# Altium PCB TESTBED_IN4007.PcbDoc
Units mil, origin at the board's own origin, x right, y up, seen from the top; angles counter-clockwise.
Board outline 4725.41 x 4252.97 mil, 2 copper layers (TOP, BOTTOM), stack 10.4 mil thick; 28 components, 21 nets, 162 pads, 472 vias.
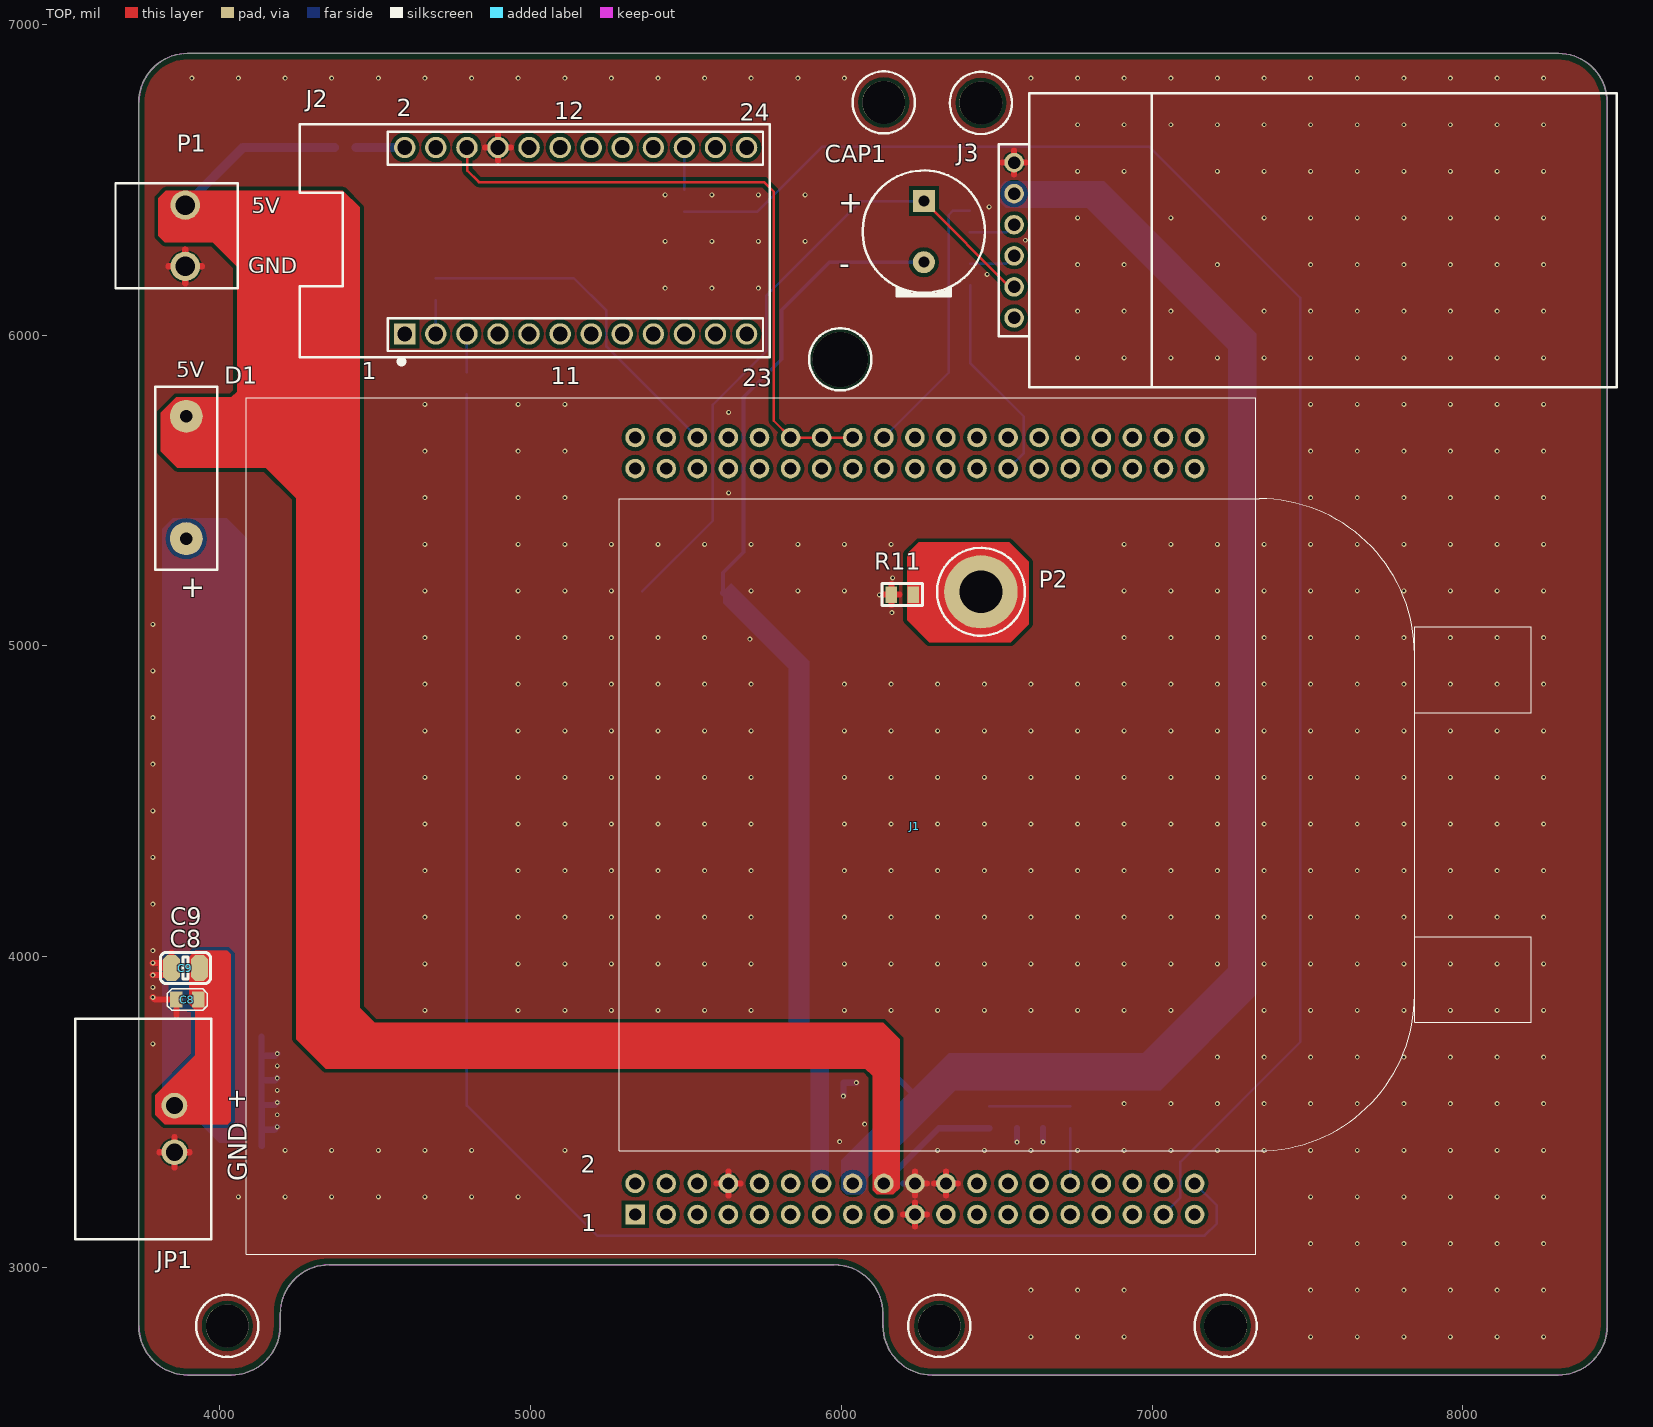
[diagram p0: TOP view]
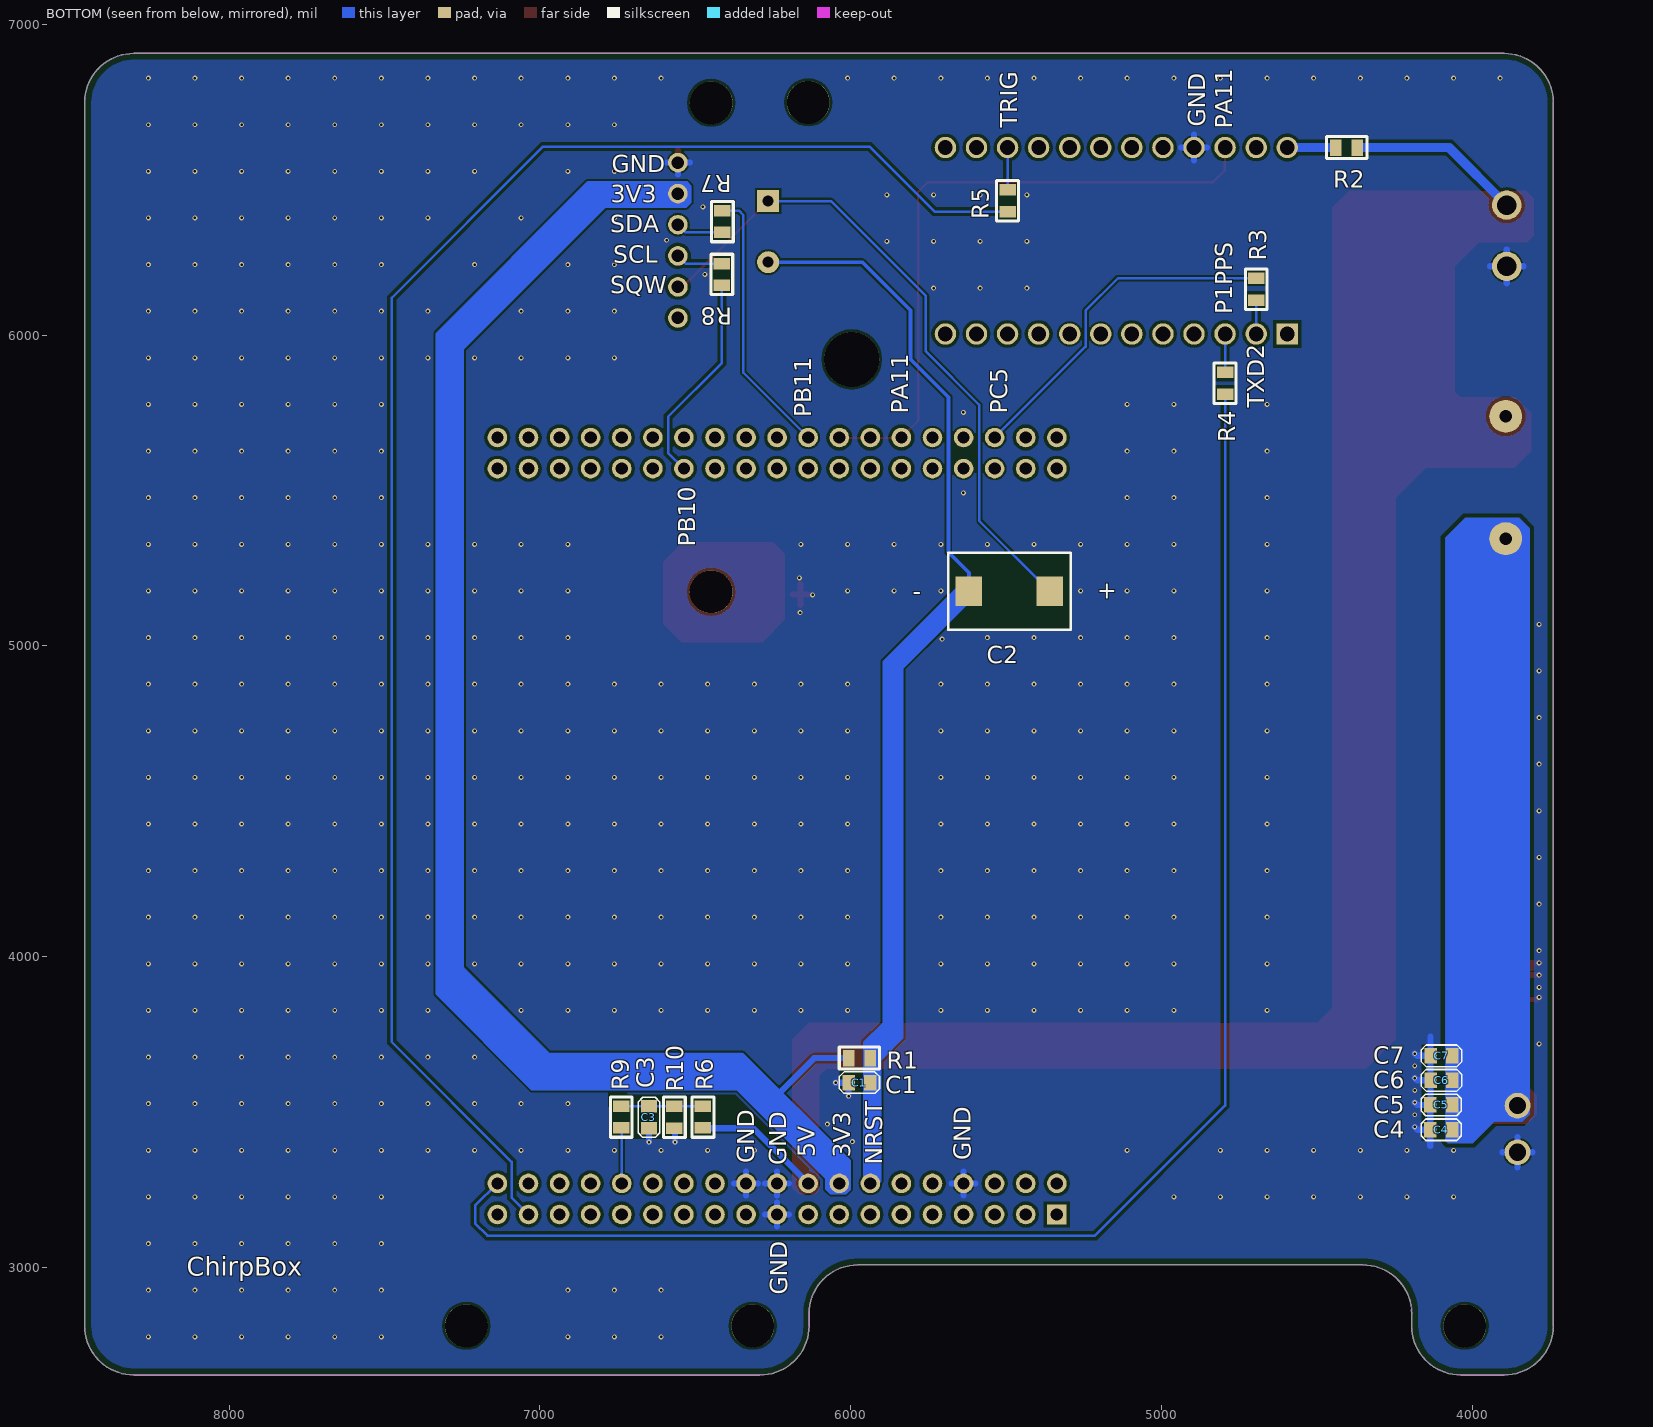
[diagram p1: BOTTOM view, seen from below]

## Layer stack, top to bottom
Top Solder: solder mask 0.4, Solder Resist, Dk 3.5
TOP: signal copper 1.2
Dielectric1: core 8, FR-4, Dk 4.5
BOTTOM: signal copper 1.2
Bottom Solder: solder mask 0.4, Solder Resist, Dk 3.5

## Board outline
3739.05,2811.89 3739.05,6748.9 cw(c3897.04,6748.9) 3897.04,6906.88 8306.27,6906.88 cw(c8306.27,6748.68) 8464.46,6748.91 8464.47,6748.9 8464.47,2811.89 cw(c8306.48,2811.95) 8306.49,2653.97 8306.48,2653.97 6291.49,2653.91 cw(c6291.49,2811.89) 6133.5,2811.89 6133.5,2851.26 ccw(c5976.52,2851.26) 5976.53,3008.24 4351.43,3008.24 ccw(c4351.43,2851.26) 4194.44,2851.26 4194.44,2811.89 cw(c4036.46,2811.89) 4036.46,2653.91 3897.04,2653.91 cw(c3897.04,2811.89)

## Design rules (kind name [scope] priority, off if disabled: settings)
Clearance Clearance_1 [All] p1: gap=6 ignorepadtopadclearanceinfootprint=FALSE except(0: Arc-Hole Track-Hole SMDPad-Hole THPad-Hole Via-Hole Fill-Hole Poly-Hole Region-Hole Text-Hole)
Clearance DRC [All] p2: gap=6 ignorepadtopadclearanceinfootprint=FALSE except(0: Arc-Hole Track-Hole SMDPad-Hole THPad-Hole Via-Hole Fill-Hole Poly-Hole Region-Hole Text-Hole)
PlaneConnect [All] p1: planeconnectstyle=Direct reliefexpansion=20 reliefentries=4 reliefconductorwidth=10 reliefairgap=10
PolygonConnect [All] p1: connectstyle=Direct reliefconductorwidth=10 reliefentries=4 polygonreliefangle="90 Angle" airgapwidth=10
RoutingVias [All] p1: holewidth=8 width=16 viastyle="Through Hole" minholewidth=8 minwidth=16 maxholewidth=8 maxwidth=16
SilkToSolderMaskClearance SilkscreenOverComponentPads [IsPad] p1: minsilkscreentomaskgap=10 clearancetoexposedcopper=TRUE
SolderMaskExpansion [All] p1: expansion=4 istentingtop=FALSE
Width [All] p1: maxlimit=200 minlimit=5 preferedwidth=20 minimp=50.000000 maximp=50.000000 favimp=50.000000
28 further rules are at their usual default settings.

## Components (designator, comment, footprint, x,y, rotation, side; value= is the part's Value field where it differs from the comment)
C1 "0.1U_C0805_DNP" C0805 5971.31,3594.73 r180 bottom
C2 "47U 25V_0_C7374_100U 25V X7R" C7374 5489.36,5175.32 r180 bottom
C3 "0.1U_C0805_0.1U" C0805 6648.55,3483.19 r90 bottom
C4 "0.1U_C0805_0.1U" C0805 4099.39,3443.22 r180 bottom
C5 "0.1U_C0805_0.1U" C0805 4099.38,3523.23 r180 bottom
C6 "0.1U_C0805_0.1U" C0805 4098.42,3602.3 r180 bottom
C7 "0.1U_C0805_0.1U" C0805 4098.42,3681.22 r180 bottom
C8 "1U_C0805_1U" C0805 3895.12,3862.29 r0 top
C9 "10U_C1206_10U" C1206 3889.17,3963.59 r180 top
CAP1 "220U 50V_CP2V_D10R0_5R0_DNP" CP2V_D10R0_5R0 6265.1,6327.31 r270 top locked
D1 "1N4007_2D7X2_1N4007" 2D7X2 3891.76,5539.78 r90 top
J1 "NUCLEO_PLUG_38PX2_(S1+S2)_NUCLE" 38PX2 6152.2,4420.59 r0 top locked
J2 "NAVSPARK CONN_12PX2_2D54_15D24_" 12PX2_2D54_15D24 5011.52,6302.42 r0 top locked
J3 "RTC_PLUG_2D54_6P_FEMALE_SMT_RTC" 2D54_6P_FEMALE_SMT 6554.32,6304.95 r0 top locked
JP1 "DC2.0_3D81X2_HOLES" 3D81X2 3753.5,3445.25 r270 top locked
P1 "BAT_MY_2PIN_BAT" MY_2PIN 3860.1,6319.7 r270 top
P2 "HOLE3D5_I3D5_O6MM_HOLE3D5" I3D5_O6MM 6448.84,5174.1 r0 top
R1 "100K_R0805_100K" R0805 5971.31,3673.99 r180 bottom
R2 "DNP_R0805_DNP" R0805 4403.8,6603.8 r0 bottom
R3 "33_R0805_33" R0805 4694.78,6148.19 r90 bottom
R4 "33_R0805_33" R0805 4794.89,5845.27 r270 bottom
R5 "33_R0805_33" R0805 5494.78,6432.92 r90 bottom
R6 "100K_R0805_100K" R0805 6475,3484 r90 bottom
R7 "33_R0805_33" R0805 6412.41,6365.55 r90 bottom
R8 "33_R0805_33" R0805 6414.11,6195.47 r270 bottom
R9 "33_R0805_33" R0805 6738,3484 r90 bottom
R10 "100K_R0805_100K" R0805 6567,3483 r90 bottom
R11 "DNP_R0805_DNP" R0805 6195.86,5165.2 r0 top locked

## Footprints (in the part's own frame and the unit in brackets; to place one, negate y for a bottom-side part, rotate by r counter-clockwise, add the part's x,y. Pads: shape width x height; smd on the part's side, far side on the other; paste and mask are expansions set on the pad)
2D7X2 [mm] "2D7X2"
  round 2.7 hole 1: 1(-4.94,0) 2(5.06,0)
  silkscreen extent -7.48,-2.54 7.48,2.54
2D54_6P_FEMALE_SMT [mm] "2D54_6P_FEMALE_SMT"
  round 1.6 hole 1.02: 1(0.03,6.36) 2(0.03,3.82) 3(0.03,1.28) 4(0.03,-1.26) 5(0.03,-3.8) 6(0.03,-6.34)
  silkscreen extent -1.22,-11.99 49.28,12.01
3D81X2 [mm] "3D81X2"
  round 2.1 hole 1.4: 1(-1.92,2.545) 2(1.89,2.545)
  silkscreen extent -9.02,-5.56 9,5.54
12PX2_2D54_15D24 [mil] "12PX2_2D54_15D24"
  rect 68.9x68.9 hole 47.24: 1(-416.73,-298.62)
  round 68.9 hole 47.24: 2(-416.73,301.38) 3(-316.73,-298.62) 4(-316.73,301.38) 5(-216.73,-298.62) 6(-216.73,301.38) 7(-116.73,-298.62) 8(-116.73,301.38) 9(-16.73,-298.62) 10(-16.73,301.38) 11(83.27,-298.62) 12(83.27,301.38) 13(183.27,-298.62) 14(183.27,301.38) 15(283.27,-298.62) 16(283.27,301.38) 17(383.27,-298.62) 18(383.27,301.38) 19(483.27,-298.62) 20(483.27,301.38) 21(583.27,-298.62) 22(583.27,301.38) 23(683.27,-298.62) 24(683.27,301.38)
  silkscreen extent -754,-388 758,377
38PX2 [mm] "38PX2"
  rect 1.6x1.6 hole 1: 1(-20.725,-31.75)
  round 1.6 hole 1: 2(-20.725,-29.21) 3(-18.185,-31.75) 4(-18.185,-29.21) 5(-15.645,-31.75) 6(-15.645,-29.21) 7(-13.105,-31.75) 8(-13.105,-29.21) 9(-10.565,-31.75) 10(-10.565,-29.21) 11(-8.025,-31.75) 12(-8.025,-29.21) 13(-5.485,-31.75) 14(-5.485,-29.21) 15(-2.945,-31.75) 16(-2.945,-29.21) 17(-0.405,-31.75) 18(-0.405,-29.21) 19(2.135,-31.75) 20(2.135,-29.21) 21(4.675,-31.75) 22(4.675,-29.21) 23(7.215,-31.75) 24(7.215,-29.21) 25(9.755,-31.75) 26(9.755,-29.21) 27(12.295,-31.75) 28(12.295,-29.21) 29(14.835,-31.75) 30(14.835,-29.21) 31(17.375,-31.75) 32(17.375,-29.21) 33(19.915,-31.75) 34(19.915,-29.21) 35(22.455,-31.75) 36(22.455,-29.21) 37(24.995,-31.75) 38(24.995,-29.21) 39(-20.725,29.21) 40(-20.725,31.75) 41(-18.185,29.21) 42(-18.185,31.75) 43(-15.645,29.21) 44(-15.645,31.75) 45(-13.105,29.21) 46(-13.105,31.75) 47(-10.565,29.21) 48(-10.565,31.75) 49(-8.025,29.21) 50(-8.025,31.75) 51(-5.485,29.21) 52(-5.485,31.75) 53(-2.945,29.21) 54(-2.945,31.75) 55(-0.405,29.21) 56(-0.405,31.75) 57(2.135,29.21) 58(2.135,31.75) 59(4.675,29.21) 60(4.675,31.75) 61(7.215,29.21) 62(7.215,31.75) 63(9.755,29.21) 64(9.755,31.75) 65(12.295,29.21) 66(12.295,31.75) 67(14.835,29.21) 68(14.835,31.75) 69(17.375,29.21) 70(17.375,31.75) 71(19.915,29.21) 72(19.915,31.75) 73(22.455,29.21) 74(22.455,31.75) 75(24.995,29.21) 76(24.995,31.75)
  silkscreen extent -52.51,-35 52.51,35
C0805 [mm] "C0805"
  rect 1.02x1.27 smd: 1(0.89,0) 2(-0.89,0)
  silkscreen extent -1.64,-0.88 1.64,0.88
C1206 [mil] "C1206"
  oct 55x85 smd: 1(-45.28,0) 2(45.28,0)
  silkscreen extent -81,-50 81,50
C7374 [mm] "C7374"
  rect 2.16x2.41 smd: 1(3.315,0.005) 2(-3.295,0.005)
  silkscreen extent -4.98,-3.15 5.02,3.15
CP2V_D10R0_5R0 [mm] "CP2V_D10R0_5R0"
  rect 1.8x1.8 hole 0.9: 1(-2.649,0)
  round 1.8 hole 0.9: 2(2.351,0)
  silkscreen extent -5.15,-5 5.15,5
I3D5_O6MM [mm] "I3D5_O6MM"
  round 6 smd: 1(0,0)
  silkscreen extent -3.59,-3.59 3.59,3.59
MY_2PIN [mm] "MY_2PIN"
  round 2.4 hole 1.6: 1(-2.505,0.72) 2(2.495,0.72)
  silkscreen extent -4.3,-4.98 4.3,5.02
R0805 [mm] "R0805"
  rect 0.94x1.35 smd: 1(0.89,0) 2(-0.89,0)
  silkscreen extent -1.65,-0.89 1.65,0.89

## Free pads (board coordinates)
  round 137.79 hole 137.79: 1(4023.7,2811.89) 1(6136.07,6748.9) 1(6314.94,2811.89) 1(6448.73,6747.24) 1(6448.84,5174.1) 1(7236.25,2811.89)
  round 177.16 hole 177.16: 1(5996.09,5922.13)

## Via types
v1: diameter 16, hole 8, TOP to BOTTOM, 472 vias

## Nets (pads, with @x,y where several pads share a name; then routed paths per layer and width w, separated by ;. In a path a pad name is that pad's centre, name@x,y a point inside that pad or via, vN(x,y) a via of type N, cw(c..) or ccw(c..) an arc to the next point about the centre after c; other vN are vias at no path point)
+3V3: J1.16 J3.2 R1.2 | length 274.7
  BOTTOM w20: R1.2 6117.01,3673.99 6232.98,3558.01
+5V: D1.2 J1.18 P1.1 R2.2 R6.2 | length 970.5
  BOTTOM w20: J1.18 6313.82,3448.15 R6.2@6476.07,3448.15
  BOTTOM w30: P1.1 4073.92,6603.8 R2.2
GND: C1.2 C3.2 C4.2 C5.2 C6.2 C7.2 C8.2 C9.2 J1.8 J1.19 J1.20 J1.22 J2.8 J3.1 JP1.2 P1.2 R10.2 R11.2 | length 3823.2
  TOP w20: v1(3784.24,3869.5) 3791.45,3862.29 C8.2 3860.09,3813.18 ; v1(3784.24,3940.76) 3821.06,3940.76 C9.2 ; v1(3784.24,3980.13) 3827.35,3980.13 C9.2 ; 3805.35,3370.84 JP1.2 ; 3809.29,3963.59 C9.2 ; 3834.2,6221.47 P1.2 ; 3843.89,4013.09 C9.2 ; 3853.69,3322.5 JP1.2 ; 3853.69,3419.18 JP1.2 ; 3888.45,6167.23 P1.2 ; 3888.45,6275.72 P1.2 ; 3902.03,3370.84 JP1.2 ; 3942.69,6221.47 P1.2 ; 4853.33,6603.8 J2.8 ; 4894.78,6562.35 J2.8 ; 4894.78,6645.25 J2.8 ; 4936.24,6603.8 J2.8 ; 5597.75,3270.59 J1.8 ; 5636.25,3232.09 J1.8 ; 5636.25,3309.09 J1.8 ; 5674.75,3270.59 J1.8 ; 6135.31,5165.2 R11.2 ; 6160.82,5131.63 R11.2 ; 6160.82,5198.78 R11.2 ; 6186.33,5165.2 R11.2 ; 6197.75,3170.59 J1.19 ; 6236.25,3132.09 J1.19 ; 6236.25,3209.09 J1.19 ; 6236.25,3232.09 J1.20 ; 6236.25,3309.09 J1.20 ; 6274.75,3170.59 J1.19 ; 6274.75,3270.59 J1.20 ; 6297.75,3270.59 J1.22 ; 6336.25,3232.09 J1.22 ; 6336.25,3309.09 J1.22 ; 6374.75,3270.59 J1.22 ; 6517.01,6555.35 J3.1 ; 6555.51,6516.85 J3.1 ; 6555.51,6593.84 J3.1 ; 6594,6555.35 J3.1
  BOTTOM w20: 3805.35,3370.84 JP1.2 ; 3834.2,6221.47 P1.2 ; 3853.69,3322.5 JP1.2 ; 3853.69,3419.18 JP1.2 ; 3888.45,6167.23 P1.2 ; 3888.45,6275.72 P1.2 ; 3902.03,3370.84 JP1.2 ; 3942.69,6221.47 P1.2 ; 4133.46,3743.29 C7.2 ; 4134.42,3390.86 C4.2 ; v1(4184.52,3452.13) 4175.61,3443.22 C4.2 ; v1(4184.52,3530.87) 4176.88,3523.23 C5.2 ; v1(4184.52,3609.61) 4177.22,3602.3 C6.2 ; v1(4184.52,3688.35) 4177.4,3681.22 C7.2 ; 4853.33,6603.8 J2.8 ; 4894.78,6562.35 J2.8 ; 4894.78,6645.25 J2.8 ; 4936.24,6603.8 J2.8 ; 5597.75,3270.59 J1.8 ; 5636.25,3232.09 J1.8 ; 5636.25,3309.09 J1.8 ; 5674.75,3270.59 J1.8 ; v1(6006.35,3551.68) C1.2 v1(6048.05,3594.73) ; 6197.75,3170.59 J1.19 ; 6197.75,3270.59 J1.20 ; 6236.25,3132.09 J1.19 ; 6236.25,3209.09 J1.19 ; 6236.25,3232.09 J1.20 ; 6236.25,3309.09 J1.20 ; 6274.75,3170.59 J1.19 ; 6274.75,3270.59 J1.20 ; 6297.75,3270.59 J1.22 ; 6336.25,3232.09 J1.22 ; 6336.25,3309.09 J1.22 ; 6374.75,3270.59 J1.22 ; 6517.01,6555.35 J3.1 ; 6555.51,6516.85 J3.1 ; v1(6564.89,3403.45) R10.2@6564.89,3448.15 ; 6594,6555.35 J3.1 ; v1(6648.55,3403.45) C3.2 ; C6.2 4133.47,3524.19 C5.2 ; C6.2 C7.2 ; C4.2 C5.2
  other v1: 6609.7,2777.05 6759.7,2777.05 6909.7,2777.05 7509.7,2777.05 7659.7,2777.05 7809.7,2777.05 7959.7,2777.05 8109.7,2777.05 8259.7,2777.05 6609.7,2927.05 6759.7,2927.05 6909.7,2927.05 7509.7,2927.05 7659.7,2927.05 7809.7,2927.05 7959.7,2927.05 8109.7,2927.05 8259.7,2927.05 7509.7,3077.05 7659.7,3077.05 7809.7,3077.05 7959.7,3077.05 8109.7,3077.05 8259.7,3077.05 4059.7,3227.05 4209.7,3227.05 4359.7,3227.05 4509.7,3227.05 4659.7,3227.05 4809.7,3227.05 4959.7,3227.05 7509.7,3227.05 7659.7,3227.05 7809.7,3227.05 7959.7,3227.05 8109.7,3227.05 8259.7,3227.05 4059.7,3377.05 4209.7,3377.05 4359.7,3377.05 4509.7,3377.05 4659.7,3377.05 4809.7,3377.05 5109.7,3377.05 6309.7,3377.05 6459.7,3377.05 6609.7,3377.05 6759.7,3377.05 6909.7,3377.05 7059.7,3377.05 7209.7,3377.05 7359.7,3377.05 7509.7,3377.05 7659.7,3377.05 7809.7,3377.05 7959.7,3377.05 8109.7,3377.05 8259.7,3377.05 5994,3405 6074.71,3461.4 4184.52,3491.5 6909.7,3527.05 7059.7,3527.05 7209.7,3527.05 7359.7,3527.05 7509.7,3527.05 7659.7,3527.05 7809.7,3527.05 7959.7,3527.05 8109.7,3527.05 8259.7,3527.05 4184.52,3570.24 4184.52,3648.98 7209.7,3677.05 7359.7,3677.05 7509.7,3677.05 7659.7,3677.05 7809.7,3677.05 7959.7,3677.05 8109.7,3677.05 8259.7,3677.05 3784.24,3719.5 4659.7,3827.05 4959.7,3827.05 5109.7,3827.05 5259.7,3827.05 5409.7,3827.05 5559.7,3827.05 5709.7,3827.05 6009.7,3827.05 6159.7,3827.05 6309.7,3827.05 6459.7,3827.05 6609.7,3827.05 6759.7,3827.05 6909.7,3827.05 7059.7,3827.05 7359.7,3827.05 7509.7,3827.05 7659.7,3827.05 7809.7,3827.05 7959.7,3827.05 8109.7,3827.05 8259.7,3827.05 3784.24,3901.39 4659.7,3977.05 4959.7,3977.05 5109.7,3977.05 5259.7,3977.05 5409.7,3977.05 5559.7,3977.05 5709.7,3977.05 6009.7,3977.05 6159.7,3977.05 6309.7,3977.05 6459.7,3977.05 6609.7,3977.05 6759.7,3977.05 6909.7,3977.05 7059.7,3977.05 7209.7,3977.05 7359.7,3977.05 7509.7,3977.05 7659.7,3977.05 7809.7,3977.05 7959.7,3977.05 8109.7,3977.05 8259.7,3977.05 3784.24,4019.5 4659.7,4127.05 4959.7,4127.05 5109.7,4127.05 5259.7,4127.05 5409.7,4127.05 5559.7,4127.05 5709.7,4127.05 6009.7,4127.05 6159.7,4127.05 6309.7,4127.05 6459.7,4127.05 6609.7,4127.05 6759.7,4127.05 6909.7,4127.05 7059.7,4127.05 7209.7,4127.05 7359.7,4127.05 7509.7,4127.05 7659.7,4127.05 7809.7,4127.05 7959.7,4127.05 8109.7,4127.05 8259.7,4127.05 3784.24,4169.5 4659.7,4277.05 4959.7,4277.05 5109.7,4277.05 5259.7,4277.05 5409.7,4277.05 5559.7,4277.05 5709.7,4277.05 6009.7,4277.05 6159.7,4277.05 6309.7,4277.05 6459.7,4277.05 6609.7,4277.05 6759.7,4277.05 6909.7,4277.05 7059.7,4277.05 7209.7,4277.05 7359.7,4277.05 7509.7,4277.05 7659.7,4277.05 7809.7,4277.05 7959.7,4277.05 8109.7,4277.05 8259.7,4277.05 3784.24,4319.5 4659.7,4427.05 4959.7,4427.05 5109.7,4427.05 5259.7,4427.05 5409.7,4427.05 5559.7,4427.05 5709.7,4427.05 6009.7,4427.05 6159.7,4427.05 6309.7,4427.05 6459.7,4427.05 6609.7,4427.05 6759.7,4427.05 6909.7,4427.05 7059.7,4427.05 7209.7,4427.05 7359.7,4427.05 7509.7,4427.05 7659.7,4427.05 7809.7,4427.05 7959.7,4427.05 8109.7,4427.05 8259.7,4427.05 3784.24,4469.5 4659.7,4577.05 4959.7,4577.05 5109.7,4577.05 5259.7,4577.05 5409.7,4577.05 5559.7,4577.05 5709.7,4577.05 6009.7,4577.05 6159.7,4577.05 6309.7,4577.05 6459.7,4577.05 6609.7,4577.05 6759.7,4577.05 6909.7,4577.05 7059.7,4577.05 7209.7,4577.05 7359.7,4577.05 7509.7,4577.05 7659.7,4577.05 7809.7,4577.05 7959.7,4577.05 8109.7,4577.05 8259.7,4577.05 3784.24,4619.5 4659.7,4727.05 4959.7,4727.05 5109.7,4727.05 5259.7,4727.05 5409.7,4727.05 5559.7,4727.05 5709.7,4727.05 6009.7,4727.05 6159.7,4727.05 6309.7,4727.05 6459.7,4727.05 6609.7,4727.05 6759.7,4727.05 6909.7,4727.05 7059.7,4727.05 7209.7,4727.05 7359.7,4727.05 7509.7,4727.05 7659.7,4727.05 7809.7,4727.05 7959.7,4727.05 8109.7,4727.05 8259.7,4727.05 3784.24,4769.5 4659.7,4877.05 4959.7,4877.05 5109.7,4877.05 5259.7,4877.05 5409.7,4877.05 5559.7,4877.05 5709.7,4877.05 6009.7,4877.05 6159.7,4877.05 6309.7,4877.05 6459.7,4877.05 6609.7,4877.05 6759.7,4877.05 6909.7,4877.05 7059.7,4877.05 7209.7,4877.05 7359.7,4877.05 7509.7,4877.05 7659.7,4877.05 7809.7,4877.05 7959.7,4877.05 8109.7,4877.05 8259.7,4877.05 3784.24,4919.5 5705,5022 4659.7,5027.05 4959.7,5027.05 5109.7,5027.05 5259.7,5027.05 5409.7,5027.05 5559.7,5027.05 6909.7,5027.05 7059.7,5027.05 7209.7,5027.05 7359.7,5027.05 7509.7,5027.05 7659.7,5027.05 7809.7,5027.05 7959.7,5027.05 8109.7,5027.05 8259.7,5027.05 3784.24,5069.5 6162.34,5107.15 6121.98,5164.15 4659.7,5177.05 4959.7,5177.05 5109.7,5177.05 5259.7,5177.05 5709.7,5177.05 5859.7,5177.05 6009.7,5177.05 6909.7,5177.05 7059.7,5177.05 7209.7,5177.05 7359.7,5177.05 7509.7,5177.05 7659.7,5177.05 7809.7,5177.05 7959.7,5177.05 8109.7,5177.05 8259.7,5177.05 6164.3,5219.18 4659.7,5327.05 4959.7,5327.05 5109.7,5327.05 5259.7,5327.05 5409.7,5327.05 5559.7,5327.05 5709.7,5327.05 5859.7,5327.05 6009.7,5327.05 6159.7,5327.05 6909.7,5327.05 7059.7,5327.05 7209.7,5327.05 7359.7,5327.05 7509.7,5327.05 7659.7,5327.05 7809.7,5327.05 7959.7,5327.05 8109.7,5327.05 8259.7,5327.05 4659.7,5477.05 4959.7,5477.05 5109.7,5477.05 7509.7,5477.05 7659.7,5477.05 7809.7,5477.05 7959.7,5477.05 8109.7,5477.05 8259.7,5477.05 5637.24,5492.67 4659.7,5627.05 4959.7,5627.05 5109.7,5627.05 7509.7,5627.05 7659.7,5627.05 7809.7,5627.05 7959.7,5627.05 8109.7,5627.05 8259.7,5627.05 5637.24,5751.65 4659.7,5777.05 4959.7,5777.05 5109.7,5777.05 7509.7,5777.05 7659.7,5777.05 7809.7,5777.05 7959.7,5777.05 8109.7,5777.05 8259.7,5777.05 6759.7,5927.05 6909.7,5927.05 7059.7,5927.05 7209.7,5927.05 7359.7,5927.05 7509.7,5927.05 7659.7,5927.05 7809.7,5927.05 7959.7,5927.05 8109.7,5927.05 8259.7,5927.05 6759.7,6077.05 6909.7,6077.05 7059.7,6077.05 7359.7,6077.05 7509.7,6077.05 7659.7,6077.05 7809.7,6077.05 7959.7,6077.05 8109.7,6077.05 8259.7,6077.05 5432.86,6151.5 5582.86,6151.5 5732.86,6151.5 6469.06,6195.4 6759.7,6227.05 6909.7,6227.05 7209.7,6227.05 7509.7,6227.05 7659.7,6227.05 7809.7,6227.05 7959.7,6227.05 8109.7,6227.05 8259.7,6227.05 5432.86,6301.5 5582.86,6301.5 5732.86,6301.5 5882.86,6301.5 6592.1,6305.43 6759.7,6377.05 7059.7,6377.05 7359.7,6377.05 7509.7,6377.05 7659.7,6377.05 7809.7,6377.05 7959.7,6377.05 8109.7,6377.05 8259.7,6377.05 6475.41,6413.11 5432.86,6451.5 5582.86,6451.5 5732.86,6451.5 5882.86,6451.5 6759.7,6527.05 6909.7,6527.05 7209.7,6527.05 7359.7,6527.05 7509.7,6527.05 7659.7,6527.05 7809.7,6527.05 7959.7,6527.05 8109.7,6527.05 8259.7,6527.05 6759.7,6677.05 6909.7,6677.05 7059.7,6677.05 7209.7,6677.05 7359.7,6677.05 7509.7,6677.05 7659.7,6677.05 7809.7,6677.05 7959.7,6677.05 8109.7,6677.05 8259.7,6677.05 3909.7,6827.05 4059.7,6827.05 4209.7,6827.05 4359.7,6827.05 4509.7,6827.05 4659.7,6827.05 4809.7,6827.05 4959.7,6827.05 5109.7,6827.05 5259.7,6827.05 5409.7,6827.05 5559.7,6827.05 5709.7,6827.05 5859.7,6827.05 6009.7,6827.05 6609.7,6827.05 6759.7,6827.05 6909.7,6827.05 7059.7,6827.05 7209.7,6827.05 7359.7,6827.05 7509.7,6827.05 7659.7,6827.05 7809.7,6827.05 7959.7,6827.05 8109.7,6827.05 8259.7,6827.05
N3250342: C3.1 R6.1 R9.1 R10.1 | length 260.2
  BOTTOM w8: R6.1@6476.07,3518.23 6564.89,3518.23 C3.1 R9.1@6736.25,3518.23
N3272272: C4.1 C5.1 C6.1 C7.1 C8.1 C9.1 D1.1 JP1.1
N32806180: P2.1 pad.1@6448.84,5174.1 R11.1 | length 593.1
  TOP w20: 6230.9,5131.63 R11.1 ; 6230.9,5198.78 R11.1 ; 6256.41,5165.2 R11.1 ; 6323.73,5174.1 P2.1 ; 6448.84,5048.98 P2.1 ; 6448.84,5299.21 P2.1 ; 6573.96,5174.1 P2.1
N324336412: J2.2 R2.1 | length 155.9
  BOTTOM w30: R2.1 J2.2
NRST: C1.1 C2.2 CAP1.2 J1.14 R1.1 | length 3541.1
  BOTTOM w8: C2.2@5619.09,5170.59 C2.2 ; J1.14 5936.44,3270.78 J1.14@5936.44,3285.8 ; R1.1 R1.1@5936.27,3682.06
  BOTTOM w12: C2.2 5619.09,5235.56 5684.83,5301.3 5684.83,5800.33 5807,5922.5 5807,6080.22 5961.55,6234.77 CAP1.2
  BOTTOM w20: C2.2@5619.09,5170.59 5864.59,4925.09 5864.59,3753.74 R1.1@5936.27,3682.06 ; R1.1 C1.1 5936.44,3594.56 J1.14@5936.44,3285.8
P1PPS: J2.5 R4.2 | length 123.5
  BOTTOM w8: J2.5 4794.89,6003.7 R4.2
PA1/A1: J1.30 R9.2 | length 177.6
  BOTTOM w8: J1.30 R9.2@6736.25,3448.15
PA11: J1.50 J1.52 J1.54 J2.6 | length 2102.4
  TOP w8: J2.6 4796.03,6602.55 4796.03,6529.72 4833.21,6492.55 5751.34,6492.55 5782.24,6461.65 5782.24,5724.6 J1.50 J1.52 J1.54
PB10: J1.63 R8.1 | length 682.5
  BOTTOM w8: R8.1 6414.11,5910.58 6587.08,5737.61 6587.08,5621.41 J1.63
PB11: J1.56 R7.1 | length 875.3
  BOTTOM w8: J1.56 6345.17,5879.51 6345.17,6386.18 6359.57,6400.58 R7.1
PC0: J1.38 R4.1 | length 5050.6
  BOTTOM w8: R4.1 4794.89,3520.93 5213.53,3102.28 7168.29,3102.28 7208.03,3142.03 7208.03,3198.81 J1.38
PC2: J1.35 R5.2 | length 5401.5
  BOTTOM w8: R5.2 5729.74,6397.88 5938.8,6606.95 6989.45,6606.95 7476.28,6120.12 7476.28,3725.72 7090.39,3339.83 7090.39,3224.73 J1.35
PC5: J1.44 R3.1 | length 1121.5
  BOTTOM w8: R3.1 5139.24,6183.23 5243.49,6078.98 5243.49,5963.35 J1.44
SCL: J3.4 R8.2 | length 151.7
  BOTTOM w8: R8.2 6530.66,6230.51 J3.4
SDA: J3.3 R7.2 | length 153.4
  BOTTOM w8: R7.2 6530.66,6330.51 J3.3
SQW: C2.1 CAP1.1 J3.5 | length 2154.8
  TOP w8: CAP1.1 6541.37,6155.35 J3.5
  BOTTOM w8: C2.1 5586.1,5402.76 5586.1,5776.11 5757.48,5947.49 5757.48,6126.33 6062.77,6431.62 CAP1.1
TRIG: J2.20 R5.1 | length 135.8
  BOTTOM w8: R5.1 J2.20
TXD2: J2.3 R3.2 | length 109.4
  BOTTOM w8: J2.3 R3.2
pads on no net: J1.1 J1.2 J1.3 J1.4 J1.5 J1.6 J1.7 J1.9 J1.10 J1.11 J1.12 J1.13 J1.15 J1.17 J1.21 J1.23 J1.24 J1.25 J1.26 J1.27 J1.28 J1.29 J1.31 J1.32 J1.33 J1.34 J1.36 J1.37 J1.39 J1.40 J1.41 J1.42 J1.43 J1.45 J1.46 J1.47 J1.48 J1.49 J1.51 J1.53 J1.55 J1.57 J1.58 J1.59 J1.60 J1.61 J1.62 J1.64 J1.65 J1.66 J1.67 J1.68 J1.69 J1.70 J1.71 J1.72 J1.73 J1.74 J1.75 J1.76 J2.1 J2.4 J2.7 J2.9 J2.10 J2.11 J2.12 J2.13 J2.14 J2.15 J2.16 J2.17 J2.18 J2.19 J2.21 J2.22 J2.23 J2.24 J3.6

## Polygon pours and split planes (outlines as drawn)
no net on 2020_1126_TOP (solid): 6159.12,5793.01 6126.8,5760.37 6045.04,5873.65 6159.12,5793.01
no net on 2020_1126_TOP (solid): 5833.06,6051.24 5865.38,6083.88 5947.13,5970.61 5833.06,6051.24
no net on 2020_1126_TOP (solid): 6097.63,2738.16 6068.54,2702.61 5976.43,2807.64 6097.63,2738.16
no net on 2020_1126_TOP (solid): 5748.59,2964.37 5777.67,2999.92 5869.78,2894.89 5748.59,2964.37
no net on 2020_1126_TOP (solid): 3640.34,7410.7 3609.51,7376.65 3522.8,7486.18 3640.34,7410.7
no net on 2020_1126_TOP (solid): 3232.71,7717.92 3263.54,7751.96 3350.26,7642.44 3232.71,7717.92
no net on 2020_1126_TOP (solid): 1379.26,6693.78 1308.4,6693.78 1343.83,6906.38 1379.26,6693.78
no net on 2020_1126_TOP (solid): 1308.4,2867.01 1379.26,2867.01 1343.83,2654.41 1308.4,2867.01
no net on 2020_1126_TOP (solid): 3952.15,8549.26 3952.15,8478.4 3739.55,8513.83 3952.15,8549.26
no net on 2020_1126_TOP (solid): 8251.37,8478.4 8251.37,8549.26 8463.97,8513.83 8251.37,8478.4
GND on TOP "TOP-GND" (solid, pour order 18): 162 vertices, not listed, extent 3758.07,2675 8442.48,6886.97
N32806180 on TOP "TOP-N32806180" (solid, pour order 12): 6603.1,5069.97 6545.37,5012.25 6282.19,5012.25 6211.52,5082.92 6211.52,5133.63 6254.41,5133.63 6254.41,5196.78 6211.52,5196.78 6211.52,5296.07 6248.6,5333.16 6540.48,5333.16 6603.1,5270.54 6603.1,5069.97
N3272272 on TOP "TOP-N3272272" (solid, pour order 26): 4034.96,3471.09 4025.06,3461.2 3821.88,3461.2 3792.21,3490.87 3792.21,3554.14 3920.7,3682.63 3920.7,3828.09 3901.99,3846.8 3901.99,4000.1 3920.7,4018.81 4023.49,4018.81 4034.96,4007.35 4034.96,3471.09
N3272272 on BOTTOM "BOTTOM-N3272272" (solid, pour order 24): 3816.16,3493.94 3816.16,5377.92 3848.45,5410.2 4022.31,5410.2 4086.27,5346.24 4086.27,3410.11 4078.2,3402.04 3998.1,3402.04 3929.17,3470.97 3839.13,3470.97 3816.16,3493.94
GND on BOTTOM "BOTTOM-GND" (solid, pour order 20): 162 vertices, not listed, extent 3758.07,2675 8442.48,6886.97
+3V3 on BOTTOM "BOTTOM-+3V3" (solid, pour order 16): 6066.1,3236.41 6013.32,3236.41 6000.16,3249.57 6000.16,3344.96 6346.14,3690.95 6968.34,3690.95 7245.29,3967.9 7245.29,5952.46 6787.15,6410.6 6528.32,6410.6 6512.04,6426.88 6512.04,6480.73 6525.81,6494.51 6848.55,6494.51 7334.7,6008.35 7334.7,3878.48 7026.71,3570.48 6365.39,3570.48 6081.31,3286.4 6081.31,3251.62 6066.1,3236.41

## Keep-outs
OUTLINE:
  lines w1: 3739.56,2811.89 ccw(c3897.04,2811.89) 3897.04,2654.41 ; 3739.56,2811.89 ccw(c3897.04,2811.89) 3897.04,2654.41 ; 3739.55,2811.89 3739.55,6748.9 ; 3739.55,2811.89 3739.55,6748.9 ; 3739.56,6748.9 cw(c3897.04,6748.9) 3897.04,6906.38 ; 3739.56,6748.9 cw(c3897.04,6748.9) 3897.04,6906.38 ; 3897.04,2654.41 4036.47,2654.41 ; 3897.04,2654.41 4036.47,2654.41 ; 3897.04,6906.38 8306.27,6906.38 ; 3897.04,6906.38 8306.27,6906.38 ; 4036.47,2654.41 ccw(c4036.46,2811.89) 4193.94,2811.89 ; 4036.47,2654.41 ccw(c4036.46,2811.89) 4193.94,2811.89 ; 4193.94,2811.89 4193.94,2851.26 ; 4193.94,2811.89 4193.94,2851.26 ; 4193.95,2851.26 cw(c4351.43,2851.26) 4351.43,3008.74 ; 4193.95,2851.26 cw(c4351.43,2851.26) 4351.43,3008.74 ; 4351.43,3008.74 5976.53,3008.74 ; 4351.43,3008.74 5976.53,3008.74 ; 5976.53,3008.74 cw(c5976.52,2851.26) 6134,2851.26 ; 5976.53,3008.74 cw(c5976.52,2851.26) 6134,2851.26 ; 6134,2811.89 ccw(c6291.49,2811.89) 6291.49,2654.41 ; 6134,2811.89 ccw(c6291.49,2811.89) 6291.49,2654.41 ; 6134,2811.89 6134,2851.26 ; 6134,2811.89 6134,2851.26 ; 6291.49,2654.41 8306.48,2654.47 ; 6291.49,2654.41 8306.48,2654.47 ; 8306.27,6906.38 cw(c8306.27,6748.68) 8463.96,6748.9 ; 8306.27,6906.38 cw(c8306.27,6748.68) 8463.96,6748.9 ; 8306.48,2654.47 ccw(c8306.48,2811.95) 8463.96,2811.89 ; 8306.48,2654.47 ccw(c8306.48,2811.95) 8463.96,2811.89 ; 8463.97,2811.89 8463.97,6748.9 ; 8463.97,2811.89 8463.97,6748.9

## Other copper
TOP:
  drawing of 116 lines, arcs and shapes, not listed
BOTTOM:
  drawing of 108 lines, arcs and shapes, not listed

## Silkscreen, mask and mechanical layers (free items; w line width, h text height)
Top Overlay:
  circle w7.87: c6136.07,6748.9 r100
  circle w7.87: c6448.73,6747.24 r100
  circle w7.87: c4023.7,2811.89 r100
  circle w7.87: c6314.94,2811.89 r100
  circle w7.87: c7236.25,2811.89 r100
  circle w7.87: c5996.09,5922.13 r100
  text "+" at 5990,6394.34 h70
  text "5V" at 4103,6393 h50
  text "GND" at 4091,6199 h50
  text "-" at 5993,6196.01 h70
  text "5V" at 3859,5864 h50
  text "+" at 3873,5156.34 h70
  text "+" at 4082,3507 h60 r90
  text "GND" at 4087,3277 h60 r90
Bottom Overlay:
  text "GND" at 4859,6670 h55 r270
  text "TRIG" at 5463,6667 h55 r270
  text "PA11" at 4772,6665 h55 r270
  text "GND" at 6769,6525 h55
  text "3V3" at 6772,6428 h55
  text "SDA" at 6773.15,6330.99 h55
  text "SCL" at 6764.06,6233.16 h55
  text "SQW" at 6774,6135.24 h55
  text "P1PPS" at 4771,6068 h55 r270
  text "TXD2" at 4669,5766 h55 r270
  text "PC5" at 5495.89,5747.23 h55 r270
  text "PA11" at 5814,5747 h55 r270
  text "PB11" at 6126.89,5735.23 h55 r270
  text "PB10" at 6500,5319 h55 r270
  text "+" at 5206.75,5151.33 h55
  text "-" at 5800,5149.43 h55
  text "5V" at 6115,3354 h55 r270
  text "3V3" at 6000.23,3352.43 h55 r270
  text "GND" at 5613.66,3344.56 h55 r270
  text "GND" at 6310.66,3335.56 h55 r270
  text "NRST" at 5898,3331 h55 r270
  text "GND" at 6206.66,3329.56 h55 r270
  text "ChirpBox" at 8136,2973 h60
  text "GND" at 6203,2912 h55 r270
NCLEGEND-1-2:
  lines w1: 8752.49,3025.82 13588.49,3025.82 ; 8752.49,3275.82 13588.49,3275.82 ; 8752.49,3525.82 13588.49,3525.82 ; 8752.49,3775.82 13588.49,3775.82 ; 8752.49,4025.82 13588.49,4025.82 ; 8752.49,4275.82 13588.49,4275.82 ; 8752.49,4525.82 13588.49,4525.82 ; 8752.49,4775.82 13588.49,4775.82 ; 8752.49,5025.82 13588.49,5025.82 ; 8752.49,5275.82 13588.49,5275.82 ; 8752.49,5525.82 13588.49,5525.82 ; 8752.49,5775.82 13588.49,5775.82 ; 8752.49,6025.82 13588.49,6025.82 ; 9176.99,5400.82 9226.99,5400.82 ; 9201.99,5375.82 9201.99,5425.82 ; 9651.49,2775.82 9651.49,5775.82 ; 11542.49,2775.82 11542.49,5775.82 ; 12813.49,2775.82 12813.49,5775.82 ; 8752.49,2775.82 8752.49,6275.82 13588.49,6275.82 13588.49,2775.82 8752.49,2775.82 ; 9150.86,3900.82 9165.84,3864.67 9201.99,3849.69 9238.15,3864.67 9253.12,3900.82 9238.15,3936.98 9201.99,3951.96 9165.84,3936.98 9150.86,3900.82 ; 9180.34,4400.82 9191.16,4379.17 9212.82,4379.17 9223.64,4400.82 9212.82,4422.48 9191.16,4422.48 9180.34,4400.82
  text "DRILL CHART: TOP to BOTTOM" at 9870.49,6088.32 h125
  text "ALL UNITS ARE IN MILS" at 10120.49,5838.32 h125
  text "FIGURE" at 8901.99,5588.32 h125
  text "SIZE" at 10396.99,5588.32 h125
  text "PLATED" at 11877.99,5588.32 h125
  text "QTY" at 13050.99,5588.32 h125
  text "8.0" at 10446.99,5338.32 h125
  text "PLATED" at 11877.99,5338.32 h125
  text "472" at 13050.99,5338.32 h125
  text "35.433" at 10296.99,5088.32 h125
  text "PLATED" at 11877.99,5088.32 h125
  text "2" at 13150.99,5088.32 h125
  text "39.37" at 10346.99,4838.32 h125
  text "PLATED" at 11877.99,4838.32 h125
  text "2" at 13150.99,4838.32 h125
  text "39.37" at 10346.99,4588.32 h125
  text "PLATED" at 11877.99,4588.32 h125
  text "75" at 13100.99,4588.32 h125
  text "39.37" at 10346.99,4338.32 h125
  text "PLATED" at 11877.99,4338.32 h125
  text "1" at 13150.99,4338.32 h125
  text "40.157" at 10296.99,4088.32 h125
  text "PLATED" at 11877.99,4088.32 h125
  text "6" at 13150.99,4088.32 h125
  text "47.24" at 10346.99,3838.32 h125
  text "PLATED" at 11877.99,3838.32 h125
  text "24" at 13100.99,3838.32 h125
  text "55.118" at 10296.99,3588.32 h125
  text "PLATED" at 11877.99,3588.32 h125
  text "2" at 13150.99,3588.32 h125
  text "62.992" at 10296.99,3338.32 h125
  text "PLATED" at 11877.99,3338.32 h125
  text "2" at 13150.99,3338.32 h125
  text "137.795" at 10246.99,3088.32 h125
  text "NON-PLATED" at 11677.99,3088.32 h125
  text "6" at 13150.99,3088.32 h125
  text "177.165" at 10246.99,2838.32 h125
  text "NON-PLATED" at 11677.99,2838.32 h125
  text "1" at 13150.99,2838.32 h125
2020_1126_TOP:
  drawing of 343 lines, arcs and shapes, not listed
  text "120.0000" at 5421.45,8407.53 h212.6
  text "\fFangSong_GB2312;2-M4娣?" at 2522.55,6439.63 h236.22
  text "108.0000" at 663.52,4674.09 h212.6
  text "TOP" at 4596.23,822.7 h725.77
DRAWING_ORIGIN:
  lines w1: 3673.97,2709.11 3723.97,2709.11 ; 3698.97,2684.11 3698.97,2734.11
PIN_NUMBER:
  text "1" at 6065.92,6748.9 h25.2
  text "1" at 6378.57,6747.24 h25.2
  text "1" at 5925.93,5922.13 h25.2
  text "1" at 6378.69,5174.1 h25.2
  text "1" at 3953.54,2811.89 h25.2
  text "1" at 6244.78,2811.89 h25.2
  text "1" at 7166.09,2811.89 h25.2
PLACE_BOUND_TOP:
  lines w1: 3919.76,2707.95 3919.76,2915.83 4127.63,2915.83 4127.63,2707.95 3919.76,2707.95 ; 5892.15,5818.19 5892.15,6026.06 6100.03,6026.06 6100.03,5818.19 5892.15,5818.19 ; 6032.14,6644.96 6032.14,6852.84 6240.01,6852.84 6240.01,6644.96 6032.14,6644.96 ; 6211,2707.95 6211,2915.83 6418.87,2915.83 6418.87,2707.95 6211,2707.95 ; 6344.79,6643.31 6344.79,6851.18 6552.67,6851.18 6552.67,6643.31 6344.79,6643.31 ; 7132.31,2707.95 7132.31,2915.83 7340.18,2915.83 7340.18,2707.95 7132.31,2707.95

## Text inside footprints (layer, text, board x,y; h text height)
J1: Top Overlay "2" at 5161.4,3305.46 h55; Top Overlay "1" at 5163.18,3115.82 h55
J2: Top Overlay "11" at 5065.2,5842.3 h55; Top Overlay "12" at 5075.37,6694.46 h55; Top Overlay "1" at 4456.52,5857.51 h55; Top Overlay "23" at 5680.32,5835.99 h55; Top Overlay "24" at 5673.06,6689.55 h55; Top Overlay "2" at 4569.78,6703.8 h55